# Altium PCB debug_connector.PcbDoc
Units mil, origin at the board's own origin, x right, y up, seen from the top; angles counter-clockwise.
Board outline 1318.9 x 1692.91 mil, 2 copper layers (Top Layer, Bottom Layer); 49 components, 49 nets, 127 pads, 113 vias.
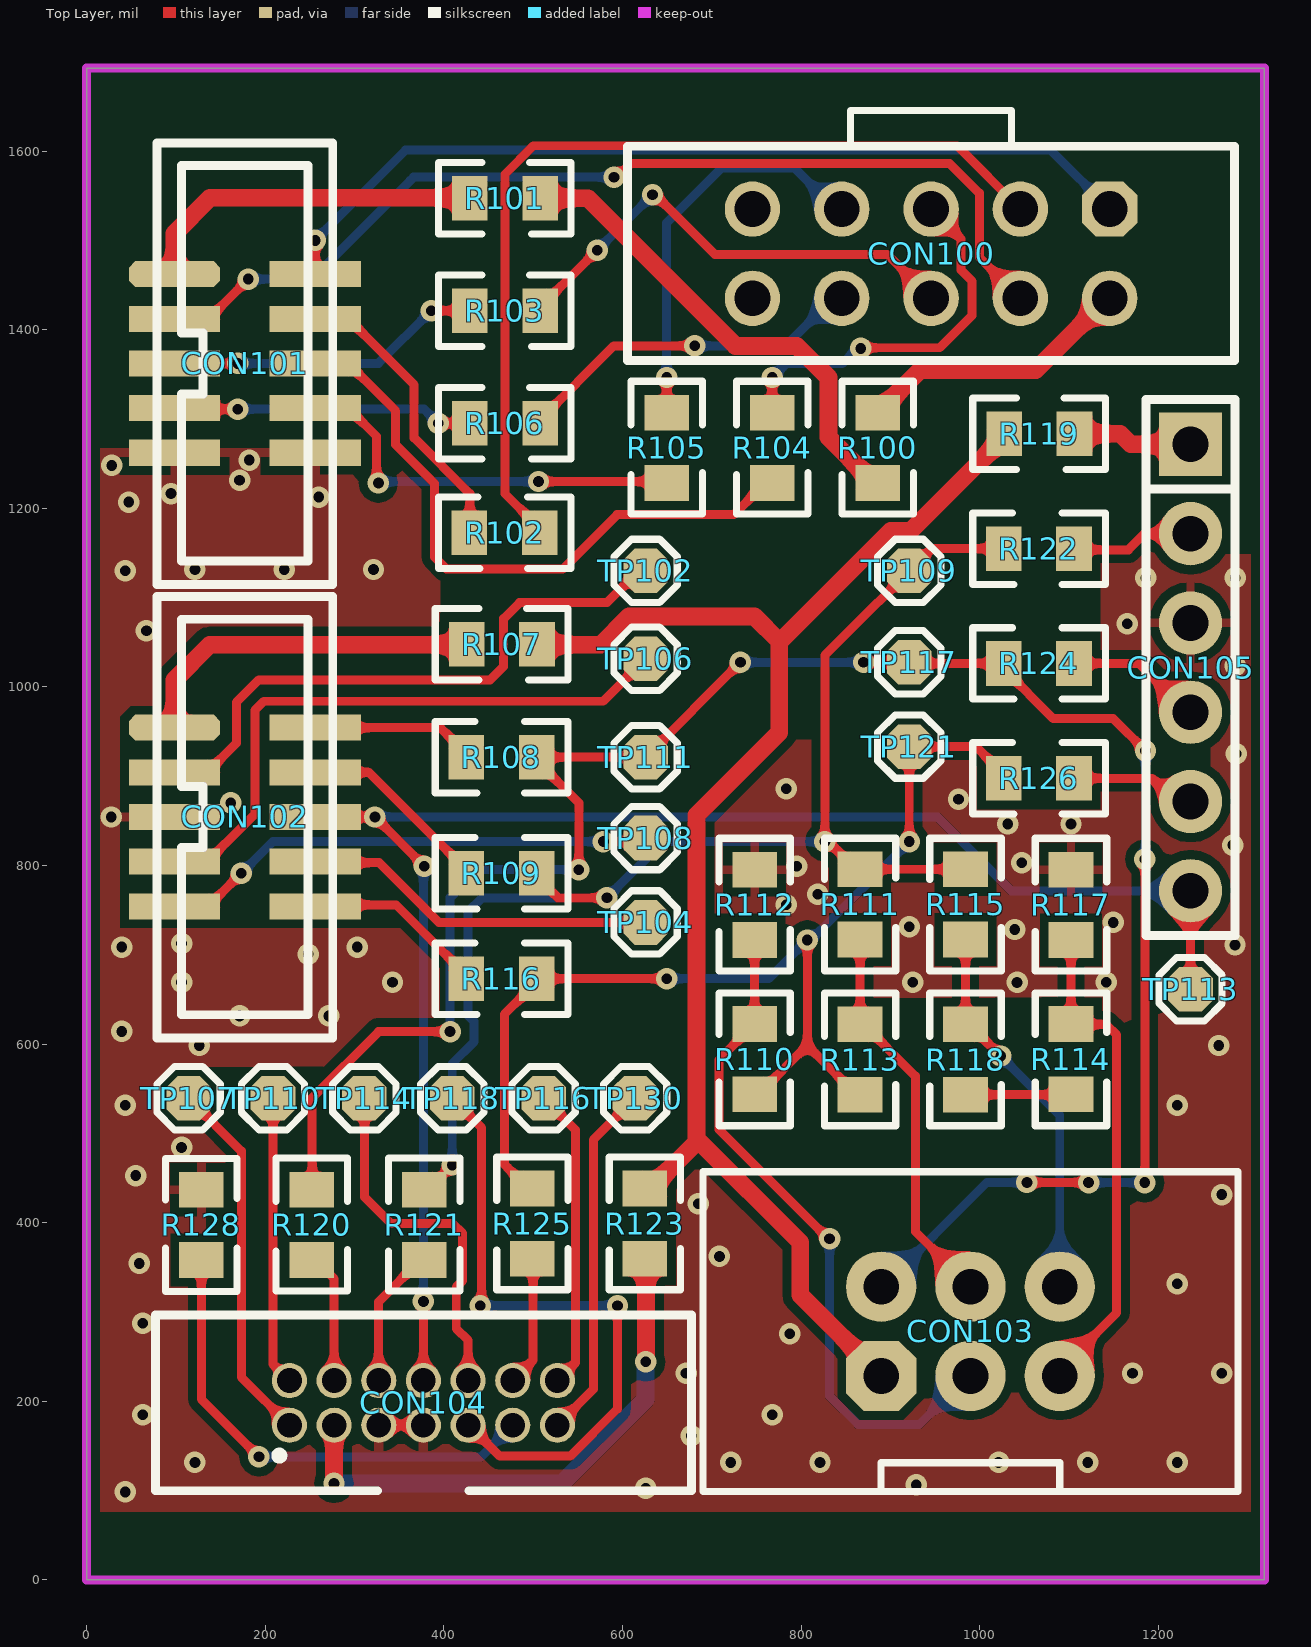
[diagram p0: Top Layer view]
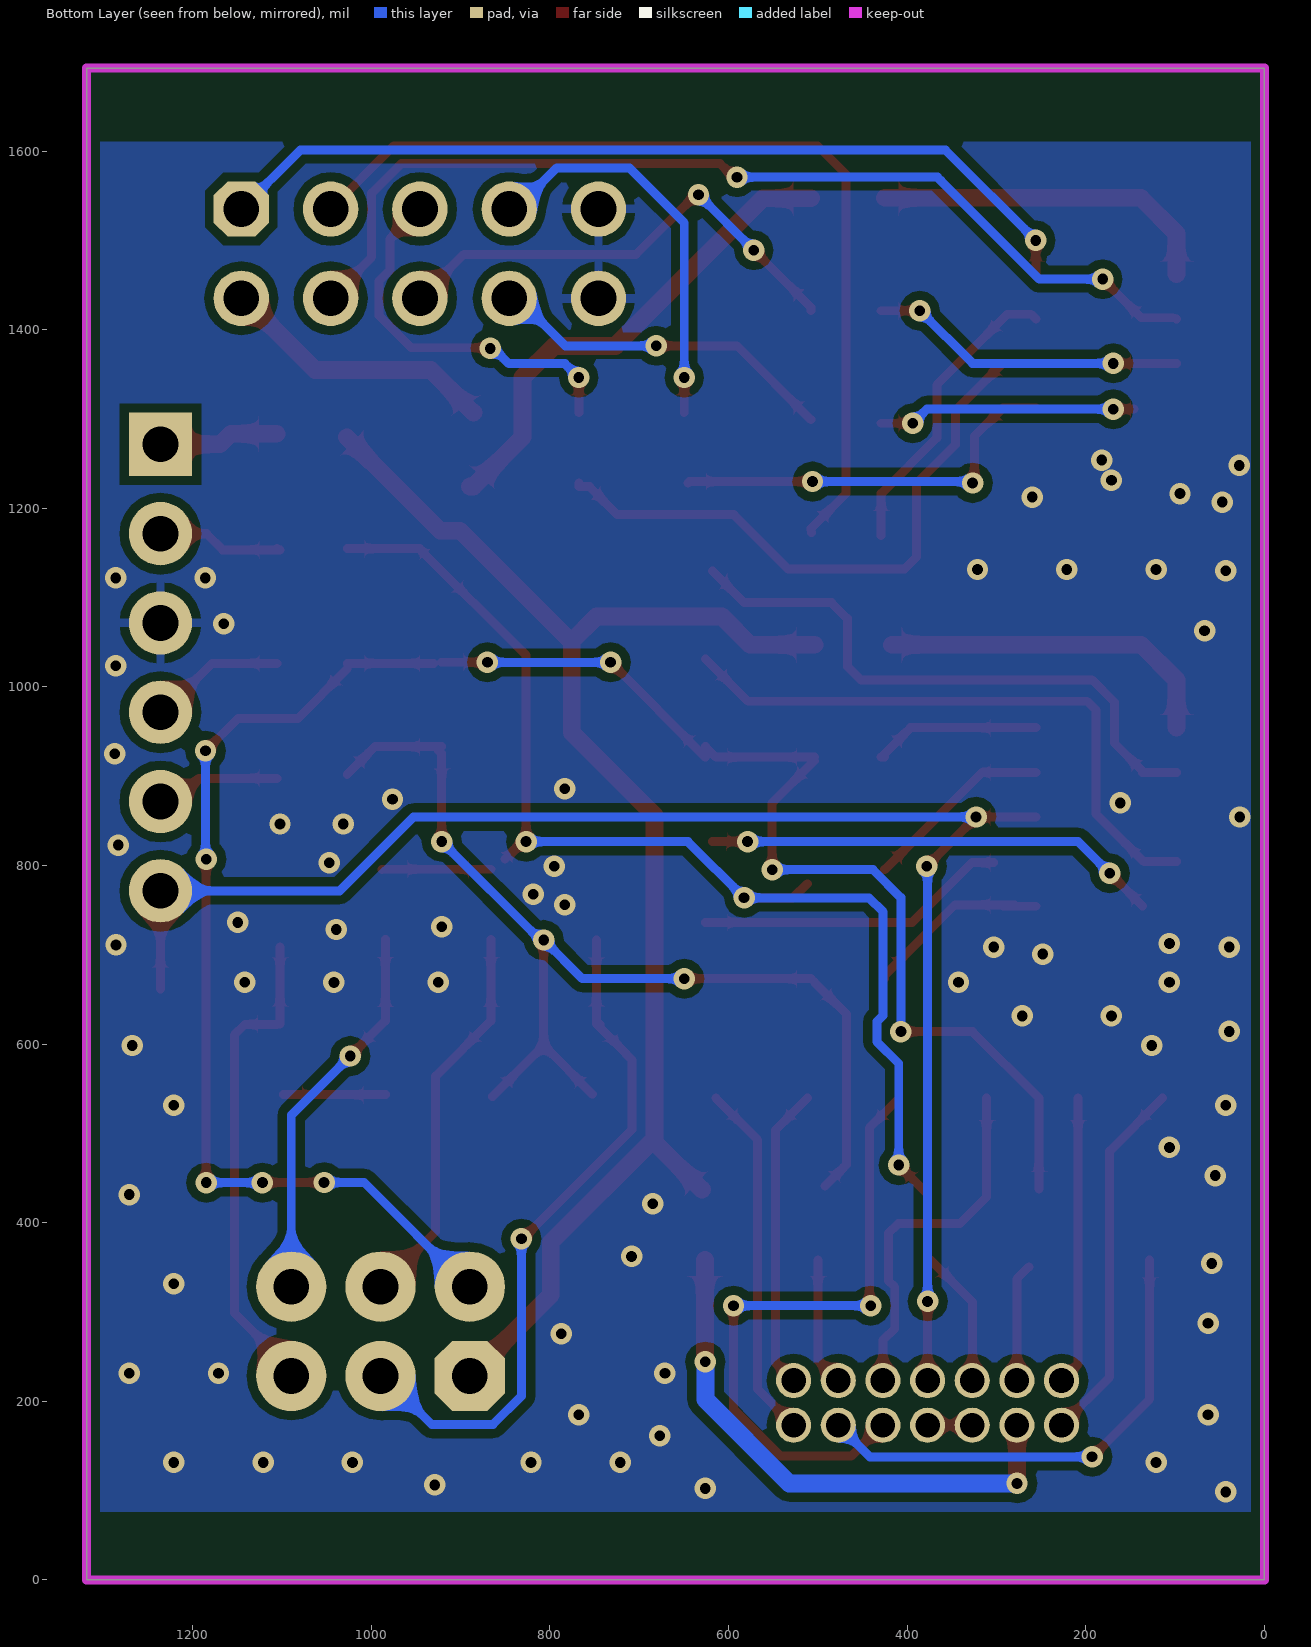
[diagram p1: Bottom Layer view, seen from below]

## Layer stack, top to bottom
Top Solder: solder mask 0.4, Solder Resist, Dk 3.5
Top Layer: signal copper 1.4
Dielectric 1: dielectric 12.6, FR-4, Dk 4.8
Bottom Layer: signal copper 1.4
Bottom Solder: solder mask 0.4, Solder Resist, Dk 3.5

## Board outline
0,0 1318.9,0 1318.9,1692.91 0,1692.91

## Design rules (kind name [scope] priority, off if disabled: settings)
Clearance [All] p1: gap=10
MatchedLengths MatchLengths_R112_Passives_R113 [InxSignalClass('xSignals_R112_Passives_R113_MatchLengthsClass')] p1: tolerance=100 checknetsindiffpair=FALSE checkdiffpairvsdiffpair=TRUE checkothers=TRUE
MatchedLengths MatchLengths_xSignals_R112_Passives [InxSignalClass('xSignals_R112_Passives_MatchLengthsClass')] p2: tolerance=100 checknetsindiffpair=FALSE checkdiffpairvsdiffpair=TRUE checkothers=TRUE
MatchedLengths MatchLengths_xSignals_R112_R113 [InxSignalClass('xSignals_R112_R113_MatchLengthsClass')] p3: tolerance=100 checknetsindiffpair=FALSE checkdiffpairvsdiffpair=TRUE checkothers=TRUE
PolygonConnect PolygonConnect_1 [IsVia] p1: connectstyle=Direct reliefconductorwidth=10 reliefentries=4 polygonreliefangle="90 Angle" airgapwidth=10
PolygonConnect [All] p2: connectstyle=Relief reliefconductorwidth=10 reliefentries=4 polygonreliefangle="90 Angle" airgapwidth=10
RoutingVias [All] p1: holewidth=12 width=24 viastyle="Through Hole" minholewidth=12 minwidth=24 maxholewidth=28 maxwidth=50
SolderMaskExpansion [All] p1: expansion=4
Width [All] p1: maxlimit=30 minlimit=10 preferedwidth=10 minimp=50.000000 maximp=50.000000 favimp=50.000000
30 further rules are at their usual default settings.

## Classes and differential pairs
component class Main: CON100 CON101 CON102 CON104 CON105 R100 R101 R102 R103 R104 R105 R106 R107 R108 R109 R112 R113 R114 R115 R116 R117 R118 R119 R120 R121 R122 R123 R124 R125 R126 R128 TP102 TP104 TP106 TP107 TP108 TP109 TP110 TP111 TP113 TP114 TP116 TP117 TP118 TP121 TP130

## Components (designator, comment, footprint, x,y, rotation, side; value= is the part's Value field where it differs from the comment)
CON100 "3M 8510-4500PL" "PINY2X5 zenskie" 1145.67,1535.43 r180 top
CON101 "HBHR-B2-10-VG-SMT" piny_1k27_2x5_smd_IDC 177.17,1362.2 r0 top
CON102 "HBHR-B2-10-VG-SMT" piny_1k27_2x5_smd_IDC 177.17,854.33 r0 top
CON103 "T821-1-06-S1" IDC_2X3_2.54MM 889.76,228.35 r0 top
CON104 "3221-14-0100-00" PINY_2X7_1.27_THT 377.17,198.19 r0 top
CON105 "piny6" piny1x6 1236.22,1271.65 r270 top
R100 "DNP/0R" 0805 885.83,1228.35 r90 top
R101 "DNP" 0805 507.87,1547.24 r180 top
R102 "DNP" 0805 428.62,1172.66 r0 top
R103 "DNP" 0805 507.87,1421.26 r180 top
R104 "DNP" 0805 767.72,1228.35 r90 top
R105 "DNP" 0805 649.61,1228.35 r90 top
R106 "DNP" 0805 507.87,1295.27 r180 top
R107 "DNP/0R" 0805 504.45,1047.81 r180 top
R108 "DNP/0R" 0805 425.2,921.26 r0 top
R109 "DNP/0R" 0805 425.2,791.34 r0 top
R110 "DNP/0R" 0805 748.03,622.56 r270 top
R111 "DNP/0R" 0805 866.14,795.79 r270 top
R112 "0R" 0805 748.03,716.54 r90 top
R113 "0R" 0805 866.14,543.31 r90 top
R114 "22R" 0805 1102.36,622.56 r270 top
R115 "0R" 0805 984.25,795.79 r270 top
R116 "DNP/0R" 0805 425.2,673.23 r0 top
R117 "DNP/0R" 0805 1102.36,716.53 r90 top
R118 "DNP/0R" 0805 984.25,543.31 r90 top
R119 "DNP/0R" 0805 1106.3,1283.46 r180 top
R120 "DNP/0R" 0805 251.97,358.27 r90 top
R121 "DNP/0R" 0805 377.95,358.27 r90 top
R122 "DNP/0R" 0805 1027.05,1154.85 r0 top
R123 "DNP/0R" 0805 625.2,359.61 r90 top
R124 "DNP/0R" 0805 1027.05,1026.25 r0 top
R125 "DNP/0R" 0805 499.21,359.61 r90 top
R126 "DNP/0R" 0805 1027.05,897.64 r0 top
R128 "100R" 0805 128.49,437.01 r270 top
TP102 "testpoint" testpoint_50mils_octagonal 625.98,1129.92 r270 top
TP104 "testpoint" testpoint_50mils_octagonal 625.98,736.22 r180 top
TP106 "testpoint" testpoint_50mils_octagonal 625.98,1031.5 r0 top
TP107 "testpoint" testpoint_50mils_octagonal 114.17,539.37 r0 top
TP108 "testpoint" testpoint_50mils_octagonal 625.98,830.71 r180 top
TP109 "testpoint" testpoint_50mils_octagonal 921.26,1129.92 r90 top
TP110 "testpoint" testpoint_50mils_octagonal 208.66,539.37 r180 top
TP111 "testpoint" testpoint_50mils_octagonal 625.98,921.26 r180 top
TP113 "testpoint" testpoint_50mils_octagonal 1236.22,661.42 r180 top
TP114 "testpoint" testpoint_50mils_octagonal 311.02,539.37 r0 top
TP116 "testpoint" testpoint_50mils_octagonal 511.81,539.37 r0 top
TP117 "testpoint" testpoint_50mils_octagonal 921.26,1027.56 r90 top
TP118 "testpoint" testpoint_50mils_octagonal 409.45,539.37 r180 top
TP121 "testpoint" testpoint_50mils_octagonal 921.26,933.07 r90 top
TP130 "testpoint" testpoint_50mils_octagonal 614.17,539.37 r180 top (schematic designator TP117)

## Footprints (in the part's own frame and the unit in brackets; to place one, negate y for a bottom-side part, rotate by r counter-clockwise, add the part's x,y. Pads: shape width x height; smd on the part's side, far side on the other; paste and mask are expansions set on the pad)
0805 [mil] "0805"
  rect 40x50 smd: 1(0,0) 2(78.74,0)
  silkscreen extent -35,-40 114,40, body extent 6,-25 85,25, height 28
IDC_2X3_2.54MM [mm] "IDC_2X3_2.54MM"
  oct 2x2 hole 1.016: 1(0,0)
  round 2 hole 1.016: 2(0,2.54) 3(2.54,0) 4(2.54,2.54) 5(5.08,0) 6(5.08,2.54)
  silkscreen extent -5.07,-3.29 10.15,5.81, body extent -5.07,-3.29 10.15,5.81, height 9.1
piny1x6 [mm]
  rect 1.8x1.8 hole 1.016: 1(0,0)
  round 1.8 hole 1.016: 2(2.54,0) 3(5.08,0) 4(7.62,0) 5(10.16,0) 6(12.7,0)
  silkscreen extent -1.27,-1.27 13.97,1.27
"PINY2X5 zenskie" [mil] "3M 8510-4500PL"
  round 62 hole 40: 1(0,100.26) 3(100,100.26) 4(100,0.26) 5(200,100.26) 6(200,0.26) 7(300,100.26) 8(300,0.26) 9(400,100.26) 10(400,0.26)
  oct 62x62 hole 40: 2(0,0.26)
  silkscreen extent -140,-110 540,170
piny_1k27_2x5_smd_IDC [mm]
  oct 2.6x0.74 smd: 1(-2,2.54)
  rect 2.6x0.74 smd: 2(2,2.54) 3(-2,1.27) 4(2,1.27) 5(-2,0) 6(2,0) 7(-2,-1.27) 8(2,-1.27) 9(-2,-2.54) 10(2,-2.54)
  silkscreen extent -2.5,-6.28 2.5,6.27, body extent -2.84,-6.35 2.83,6.25, height 5.7
PINY_2X7_1.27_THT [mm] "3221-14-0100-00"
  round 1 hole 0.7: 1(-3.81,-0.635) 2(-3.81,0.635) 3(-2.54,-0.635) 4(-2.54,0.635) 5(-1.27,-0.635) 6(-1.27,0.635) 7(0,-0.635) 8(0,0.635) 9(1.27,-0.635) 10(1.27,0.635) 11(2.54,-0.635) 12(2.54,0.635) 13(3.81,-0.635) 14(3.81,0.635)
  silkscreen extent -7.62,-2.5 7.62,2.5, body extent -7.62,-2.55 7.62,2.5, height 5.45
testpoint_50mils_octagonal [mil] "testpoint"
  oct 50x50 smd paste-3937.01: 1(0,0)
  silkscreen extent -35,-35 35,35

## Part data
CON100: library part "piny_2x5 zenskie Petroster", "Gniazdo; IDC; ¿eñskie; PIN: 10; proste; THT; z³ocony; 3A; 2,54mm"
CON101 CON102: library part AMC_Debug, "AMC Debug connector / IDC 2x5 pitch 1.27"
CON103: library part piny_2x3
CON104: "CONN HEADER VERT 14POS 1.27MM"
R100 R101 R102 R103 R104 R105 R106 R107 R108 R109 R116 R119 R120 R121 R122 R123 R124 R125 R126 R128: library part rez_3k
R110 R111 R112 R113 R114 R115 R117 R118: library part RES
TP102 TP104 TP106 TP107 TP108 TP109 TP110 TP111 TP113 TP114 TP116 TP117 TP118 TP121 TP130: "Testpoint"

## Via types
v1: diameter 24, hole 12, Top Layer to Bottom Layer, tented both sides, 113 vias

## Nets (pads, with @x,y where several pads share a name; then routed paths per layer and width w, separated by ;. In a path a pad name is that pad's centre, name@x,y a point inside that pad or via, vN(x,y) a via of type N, cw(c..) or ccw(c..) an arc to the next point about the centre after c; other vN are vias at no path point)
+3V3: R100.1 R101.1 | length 554.8
  Top Layer w20: R101.1 561.48,1547.24 726.83,1381.89 795.28,1381.89 830.71,1346.46 830.71,1279.53 883.86,1226.38 885.83,1224.41 R100.1@889.76,1224.41
+3V3_TARGET: CON103.1 R107.1 R119.2 R123.2 | length 1666.8
  Top Layer w20: R107.1@503.94,1047.24 575.95,1047.24 607.45,1078.74 688.98,1078.74 748.03,1078.74 775.59,1051.18 ; R123.2@629.92,437.01 685.04,492.13 ; CON103.1 799.21,318.9 799.21,377.95 685.04,492.13 ; R119.2@1027.56,1279.53 922.95,1174.92 900.48,1174.92 775.59,1050.03 775.59,948.82 683,856.23 683,494.17 685.04,492.13
CLK/SCK: CON100.8 R105.2 | length 445.8
  Top Layer w10: R105.2@649.61,1307.09 v1(649.61,1346.46)
  Bottom Layer w10: v1(649.61,1346.46) 649.61,1519.68 711.1,1581.17 792.32,1581.17 CON100.8@838.32,1535.17
GND: CON100.9 CON100.10 CON101.9 CON101.10 CON102.5 CON104.5 CON104.7 CON105.3 R112.2 R117.2 R128.1 | length 50
  Top Layer w10: CON104.5 CON104.7
  other v1: 43.31,98.43 625.98,102.36 929.13,106.3 121.26,131.5 721.26,131.5 821.26,131.5 1021.26,131.5 1121.26,131.5 1221.26,131.5 677.17,161.42 62.99,185.04 767.72,185.04 671.26,231.5 1171.26,231.5 1271.26,231.5 787.4,275.59 62.99,287.4 1221.26,331.5 59.06,354.33 708.66,362.2 685.04,421.26 1271.26,431.5 55.12,452.76 106.3,484.25 43.31,531.5 1221.26,531.5 125.98,598.43 1267.72,598.43 39.37,614.17 171.26,631.5 271.26,631.5 106.3,669.29 342.52,669.29 925.2,669.29 1042,669 1141.73,669.29 248.03,700.79 39.37,708.66 303.15,708.66 1286,711 106.3,712.6 1039.37,728.35 921.26,731.5 1149.61,736.22 783.46,755.91 818.9,767.72 795.28,799.21 1047.24,803.15 1283.46,822.83 1031.5,846.46 1102.36,846.46 27.56,854.33 161.42,870.08 976.38,874.02 783.46,885.83 1287.4,925.2 1286.22,1023.62 66.93,1062.99 1165.35,1070.87 1186.22,1122.05 1286.22,1122.05 43.31,1129.92 121.26,1131.5 221.26,1131.5 321.26,1131.5 47,1207 259.84,1212.6 94.49,1216.54 171.26,1231.5 28,1248 182,1254
GNDDETECT: CON104.11 R128.2 | length 546.1
  Top Layer w10: R128.2 128.48,202.22 v1(192.91,137.8)
  Bottom Layer w10: v1(192.91,137.8) 441.77,137.8 CON104.11
LED1(MCO): CON100.2 CON101.2 | length 998.4
  Top Layer w10: CON101.2@255.91,1460.63 v1(255.91,1500)
  Bottom Layer w10: v1(255.91,1500) 357.08,1601.17 1079.67,1601.17 CON100.2
LED2(TIM1_OUT): CON100.3 CON101.3 | length 1122.2
  Top Layer w10: CON101.3 102.36,1413.39 137.8,1413.39 v1(181.1,1456.69) ; v1@592.52,1568.9 609.61,1585.98 966.58,1585.98 999.67,1552.89 999.67,1481.17 CON100.3
  Bottom Layer w10: v1(181.1,1456.69) 251.97,1456.69 362.2,1566.93 366.14,1570.87 v1(590.55,1570.87)
MISO: CON100.5 R103.1 | length 541.8
  Top Layer w10: R103.1 507.87,1425.2 v1(571.68,1489) ; v1(633.68,1551) 636.92,1551 703.66,1484.25 896.59,1484.25 CON100.5
  Bottom Layer w10: v1(571.68,1489) v1(633.68,1551)
MOSI/I2C_DATA: CON100.7 R106.1 | length 384.5
  Top Layer w10: R106.1@507.87,1299.21 590.55,1381.89 v1(681.1,1381.89)
  Bottom Layer w10: v1(681.1,1381.89) 681.21,1382 782.85,1382 CON100.7@836.02,1435.17
NetCON100_1: CON100.1 R100.2 | length 323.1
  Top Layer w20: R100.2 933.57,1354.83 1062.83,1354.83 1130.8,1422.8 1152,1422.8 CON100.1@1145.67,1429.13
NetCON101_1: CON101.1 R101.2 | length 388.5
  Top Layer w20: CON101.1 98.42,1507.87 138.3,1547.75 R101.2@424.69,1547.75
NetCON101_4: CON101.4 R102.1 | length 340.6
  Top Layer w10: CON101.4 261.02,1417.32 287.75,1417.32 366.7,1338.37 366.7,1278.97 429.13,1216.54 R102.1@429.13,1169.29
NetCON101_5: CON101.5 R103.2 | length 355.2
  Top Layer w10: CON101.5 v1(169.29,1362.2) ; v1(385.83,1421.26) R103.2
  Bottom Layer w10: v1(169.29,1362.2) 326.77,1362.2 v1(385.83,1421.26)
NetCON101_6: CON101.6 R104.1 | length 719.7
  Top Layer w10: CON101.6 292.87,1362.21 346,1309.07 346,1271.38 389.77,1227.62 389.77,1145.31 403.07,1132 533,1132 594,1193 724.57,1193 755.98,1224.41 767.72,1224.41 R104.1
NetCON101_7: CON101.7 R106.2 | length 290
  Top Layer w10: CON101.7@145.67,1311.02 v1(169.29,1311.02) ; v1(393.7,1295.28) R106.2
  Bottom Layer w10: v1(169.29,1311.02) 377.95,1311.02 v1(393.7,1295.28)
NetCON101_8: CON101.8 R105.1 | length 455.1
  Top Layer w10: CON101.8 292.87,1312.21 324.63,1280.44 324.63,1230.41 v1@326.7,1228.34 ; v1(506,1230) 644.02,1230 R105.1@645.67,1228.35
  Bottom Layer w10: v1@326.77,1228.35 328.43,1230 v1(506,1230)
  other v1: 326.77,1228.35
NetCON102_1: CON102.1 R107.2 | length 388.7
  Top Layer w20: CON102.1 98.42,1007.87 137.8,1047.24 R107.2@417.32,1047.24
NetCON102_2: CON102.2 R108.1 | length 190.9
  Top Layer w10: CON102.2 396.06,954.33 429.13,921.26 R108.1
NetCON102_4: CON102.4 R109.1 | length 214.5
  Top Layer w10: CON102.4 316.14,904.33 R109.1@425.2,795.28
NetCON102_7: CON102.7 TP106.1 | length 689.9
  Top Layer w10: CON102.7 135.04,804.33 155.47,824.76 155.82,824.76 188.42,857.36 188.42,973.81 198.51,983.9 578.39,983.9 TP106.1
NetCON102_8: CON102.8 TP104.1 | length 350.6
  Top Layer w10: CON102.8@303.15,803.15 327.5,803.15 394.43,736.22 TP104.1
NetCON102_9: CON102.9 TP108.1 | length 511.9
  Top Layer w10: CON102.9@136.22,754.33 v1(173.23,791.34) ; v1(578.74,826.77) TP108.1@618.11,826.77
  Bottom Layer w10: v1(173.23,791.34) 208.66,826.77 v1(578.74,826.77)
NetCON102_10: CON102.10 R116.1 | length 232.7
  Top Layer w10: CON102.10 292.91,754.33 279.53,755.91 346.46,755.91 425.2,677.17 R116.1
NetCON103_3: CON103.3 R110.1 R112.1 | length 775.8
  Top Layer w10: R110.1@744.09,622.05 746.32,624.27 748.03,625.98 R112.1 ; R110.1 715,589.53 715,589 708.03,582.03 708.03,504.49 710.04,502.48 824.21,388.31 830.52,382 v1(832,382)
  Bottom Layer w10: v1(832,382) 832,205.84 863.87,173.97 932.32,173.97 982.76,224.41 CON103.3@992.13,224.41
NetCON103_4: CON103.4 R111.2 R113.2 | length 439.9
  Top Layer w10: R111.2 866.14,625.98 928,564.13 928,390.11 CON103.4
NetCON103_5: CON103.5 R114.1 R117.1 | length 531.1
  Top Layer w10: CON103.5@1089.76,255.91 1110.24,255.91 1153.54,299.21 1153.54,610.24 1141.86,621.92 1141.86,622.05 R114.1@1106.3,622.05 ; R114.1 R117.1@1102.36,708.66
NetCON103_6: CON103.6 R115.2 R118.2 | length 432.4
  Top Layer w10: R115.2 984.25,625.98 v1(1023.62,586.61)
  Bottom Layer w10: v1(1023.62,586.61) 1089.76,520.47 CON103.6
NetCON104_1: CON104.1 TP107.1 | length 413
  Top Layer w10: TP107.1 173.37,480.18 173.37,226.99 CON104.1
NetCON104_2: CON104.2 TP110.1 | length 323.8
  Top Layer w10: TP110.1 208.66,241.69 CON104.2
NetCON104_3: CON104.3 R123.1 | length 610.5
  Top Layer w20: CON104.3@276.36,172.38 CON104.3@277.08,173.11 ; v1(277,108) 277.08,108.08 CON104.3@277.08,173.11 ; CON104.3 CON104.3@277.08,173.11 ; v1@626.49,244.09 R123.1@626.49,358.31
  Bottom Layer w20: v1(277,108) 532,108 625.98,201.98 v1(625.98,244.09)
NetCON104_4: CON104.4 R120.1 | length 132.7
  Top Layer w10: R120.1@263.78,350.39 277.17,337.01 CON104.4
NetCON104_6: CON104.6 R121.1 | length 154.7
  Top Layer w10: CON104.6 326.77,224.41 326.77,311.02 R121.1@374.02,358.27
NetCON104_9: CON104.9 TP118.1 | length 714.4
  Top Layer w10: TP118.1@409.45,539.06 442.32,506.18 v1@442.32,307.09 ; CON104.9 428.11,173.19 462.8,138.5 491.53,138.5 512.8,138.51 541.53,138.5 594.49,191.46 v1(594.49,307.09)
  Bottom Layer w10: v1(440.95,307.09) v1@590.55,307.09
NetCON104_12: CON104.12 R125.1 | length 144.5
  Top Layer w10: CON104.12 500,246.03 R125.1@500,358.27
NetCON105_1: CON105.1 R119.1 | length 134.8
  Top Layer w20: R119.1 1157.48,1283.46 1169.29,1271.65 CON105.1
NetCON105_2: CON105.2 R122.2 | length 145
  Top Layer w10: R122.2 1102.36,1153.54 1166.54,1153.54 1184.65,1171.65 CON105.2
NetCON105_4: CON105.4 R124.2 | length 157.5
  Top Layer w10: R124.2 1178.48,1026.25 1236.22,968.5 CON105.4
NetCON105_5: CON105.5 R126.2 | length 123.9
  Top Layer w10: R126.2 1192.91,897.64 CON105.5@1218.9,871.65
RESET: R110.2 R113.1 R116.2 R125.2 R126.1 TP121.1 | length 1229
  Top Layer w10: R125.2@492.13,440.94 467.88,465.2 467.88,633.23 R116.2@503.94,669.29 ; R116.2@507.87,673.23 v1(649.61,673.23) ; R110.2@752.48,543.82 807.09,598.43 ; v1(807.09,716.53) 807.09,598.43 ; R113.1@864.17,541.34 807.09,598.43 ; v1(921.26,826.77) 921.26,925.2 TP121.1@925.2,929.13 ; TP121.1 996.06,933.07 R126.1@1027.05,902.09
  Bottom Layer w10: v1(649.61,673.23) 763.78,673.23 v1(807.09,716.53) 811.02,716.53 v1(921.26,826.77)
RS_RX: CON100.4 R102.2 | length 1037.5
  Top Layer w10: R102.2 507.87,1177.17 468.5,1216.54 468.5,1574.09 500.4,1605.98 974.86,1605.98 CON100.4
RS_TX: CON100.6 R104.2 | length 430.3
  Top Layer w10: R104.2 v1(767.72,1346.46) ; v1(867,1379) 867.83,1379.83 955.39,1379.83 991.67,1416.12 991.67,1454.23 979,1466.9 979,1501.85 CON100.6
  Bottom Layer w10: v1(767.72,1346.46) 783.26,1362 846,1362 863,1379 v1(867,1379)
SELECT: CON102.3 TP102.1 | length 672.9
  Top Layer w10: CON102.3 CON102.3@135.04,904.33 ; CON102.3@136.61,904.33 CON102.3@135.04,904.33 ; TP102.1@618.11,1129.92 582.68,1094.49 484.92,1094.49 467,1076.57 467,1022.88 451.92,1007.81 192.81,1007.81 167.8,982.8 167.8,937.1 CON102.3@135.04,904.33
STLK_RX: R114.2 R118.1 | length 114.2
  Top Layer w10: R118.1 R114.2@1098.43,543.31
SWCLK: R109.2 R111.1 R115.1 R121.2 R122.1 TP109.1 | length 1454.8
  Top Layer w10: R121.2@377.95,433.07 v1(409.45,464.57) ; R109.2@511.81,779.53 527.56,763.78 v1(582.68,763.78) ; v1(826.77,826.77) 826.77,1035.43 946.19,1154.86 R122.1 ; v1@828.74,828.74 R111.1@850.39,807.09 ; R111.1 R115.1 ; R115.1@987.68,795.79 R115.1@988.19,795.28
  Bottom Layer w10: v1(409.45,464.57) 409.45,578.26 434,602.82 434,625.18 427,632.18 427,748 442.78,763.78 v1(582.68,763.78) 645.67,826.77 v1@822.83,826.77
SWDIO: CON103.2 R108.2 R120.2 R124.1 TP111.1 TP117.1 | length 2312.4
  Top Layer w10: R120.2@252.6,437.64 252.6,539.66 326.94,614 v1(407,614) ; R108.2@503.94,917.32 551.18,870.08 v1(551.18,795.28) ; R108.2 614.17,921.26 TP111.1@625.98,933.07 ; TP111.1 v1(732.17,1027.45) ; v1(870.08,1027.56) TP117.1 ; TP117.1@930.45,1026.25 R124.1 ; R124.1@1027.05,1020.2 1082.68,964.57 1149.61,964.57 v1(1185.79,928.39) ; v1(1053,445) 1121.93,445 v1(1122.05,444.88) ; v1(1185.04,444.88) v1(1185.04,807.08)
  Bottom Layer w10: v1(407,614) 407,764 438.28,795.28 v1(551.18,795.28) ; v1(732.17,1027.45) v1@869.97,1027.45 ; CON103.2@891.34,328.35 1007.99,445 v1(1053,445) ; v1(1122.05,444.88) v1(1185.04,444.88) ; v1@1185.79,815.71 v1(1185.79,928.39)
SWO: CON102.6 CON104.8 CON105.6 TP113.1 | length 1779.6
  Top Layer w10: CON102.6 v1(322.83,854.33) v1(377.95,799.21) ; CON104.8 v1(377.17,311.81) ; TP113.1 CON105.6
  Bottom Layer w10: v1(322.83,854.33) 952.76,854.33 1035.43,771.65 CON105.6 ; v1(377.17,311.81) v1@377.17,800
T_JTDI: CON104.10 TP114.1 | length 411.3
  Top Layer w10: TP114.1 311.02,428.98 341,399 410,399 421,388 421,335.1 413.95,328.05 413.95,281.31 427.17,268.09 CON104.10
  Bottom Layer w10: CON104.10@426.42,223.19 CON104.10
T_VCP_RX: CON104.13 TP130.1 | length 402.2
  Top Layer w10: CON104.13 567.49,213.51 567.49,492.68 TP130.1
T_VCP_TX: CON104.14 TP116.1 | length 339.4
  Top Layer w10: TP116.1 547.49,503.7 547.49,243.51 CON104.14

## Polygon pours and split planes (outlines as drawn)
GND on Top Layer "TL_GND" (solid, remove dead copper, pour order 0): -3.94,-248.03 -3.94,1720.47 1374.02,1720.47 1374.02,-248.03
GND on Bottom Layer "BL_GND" (solid, remove dead copper, pour order 1): -3.94,-248.03 -3.94,1720.47 1374.02,1720.47 1374.02,-248.03

## Keep-outs
Keep-Out Layer:
  the board outline again, w10

## Other copper
Top Layer:
  pour cut-out: 133.49,407.01 133.49,385.51 134,385 148,385 151,382 155,386 155,398
  pour cut-out: 226.16,574.37 265.68,574.37 260,568.69 260,567 226,567 225,566
  pour cut-out: 131.67,574.37 191.16,574.37 173.66,556.87 149.18,556.87 149.17,556.87
  pour cut-out: 133.49,407.01 139.33,407.01 158.07,388.27
  pour cut-out: 1253.72,696.42 1251,699.14 1251,702
  pour cut-out: 37.24,928.9 37.24,942.05 42.39,936.9 39.08,933.58 39.08,928.9
  pour cut-out: 317.09,729.76 350.97,729.76 344.73,736 314,736
  pour cut-out: 194.72,729.76 159.61,729.76 159.61,736.39 159,737 160,738 196,738
  pour cut-out: 194.72,1267.21 159.61,1267.21 159.61,1282.36 194.72,1282.36
  pour cut-out: 15.29,1279.64 37.24,1279.64 24.81,1267.21
  pour cut-out: 24.81,1267.21 15.29,1267.21 15.29,1279.64
  pour cut-out: 37.24,1267.21 24.81,1267.21 37.24,1279.64
  pour cut-out: 1135.79,1061.25 1135.79,1121.21 1135.79,1119.86 1128.86,1119.86 1128,1119
  pour cut-out: 1259.13,931.97 1259.13,911.34 1252.66,911.34 1248.08,915.92 1248.08,927.39
  pour cut-out: 1057.05,862.64 1075.79,862.64 1076,862.85 1076,877 1055,877
  pour cut-out: 1275.91,1148.74 1303.6,1148.74 1303.6,1171.65 1301.26,1174 1277,1174
  pour cut-out: 794.43,941.01 811.48,941.01 811.48,948.82 795.98,948.82
  pour cut-out: 395.71,1082.81 396,1083.1 396,1119 418,1119 420,1117
  pour cut-out: 1019.25,652.05 1067.36,652.05 1067.18,651.86 1067.18,645.18 1019.18,645.18 1019,645
  pour cut-out: 1019.25,652.05 1066.85,652.05 1067.36,652.56 1067.36,645.36 1067,645 1019,645
  pour cut-out: 901.14,652.05 949.25,652.05 949.25,641.25 948,640 901,640
  pour cut-out: 713.03,746.54 703.39,746.54 703.39,622.41 708.03,620 713.03,618.02 713.03,652.56 732.74,652.56 732.74,686.54 713.03,686.54
  pour cut-out: 577,414 654.54,414 660.2,408.35 660.2,389.61 577.39,389.61 576,391
  pour cut-out: 0,1696.85 1318.9,1696.85 1318.9,1610.24 0,1610.24
  pour cut-out: 0,76 1318.9,76 1318.9,-3.94 0,-3.94
Bottom Layer:
  pour cut-out: 0,1696.85 1318.9,1696.85 1318.9,1610.24 0,1610.24
  pour cut-out: 0,76 1318.9,76 1318.9,-3.94 0,-3.94

## Silkscreen, mask and mechanical layers (free items; w line width, h text height)
Mechanical 1:
  the board outline again, w10